# Altium PCB 1wire-Thermocouple.PcbDoc
Units mil, origin at the board's own origin, x right, y up, seen from the top; angles counter-clockwise.
Board outline 838.58 x 1975.39 mil, 2 copper layers (Top Layer, Bottom Layer); 6 components, 7 nets, 32 pads, 2 vias.
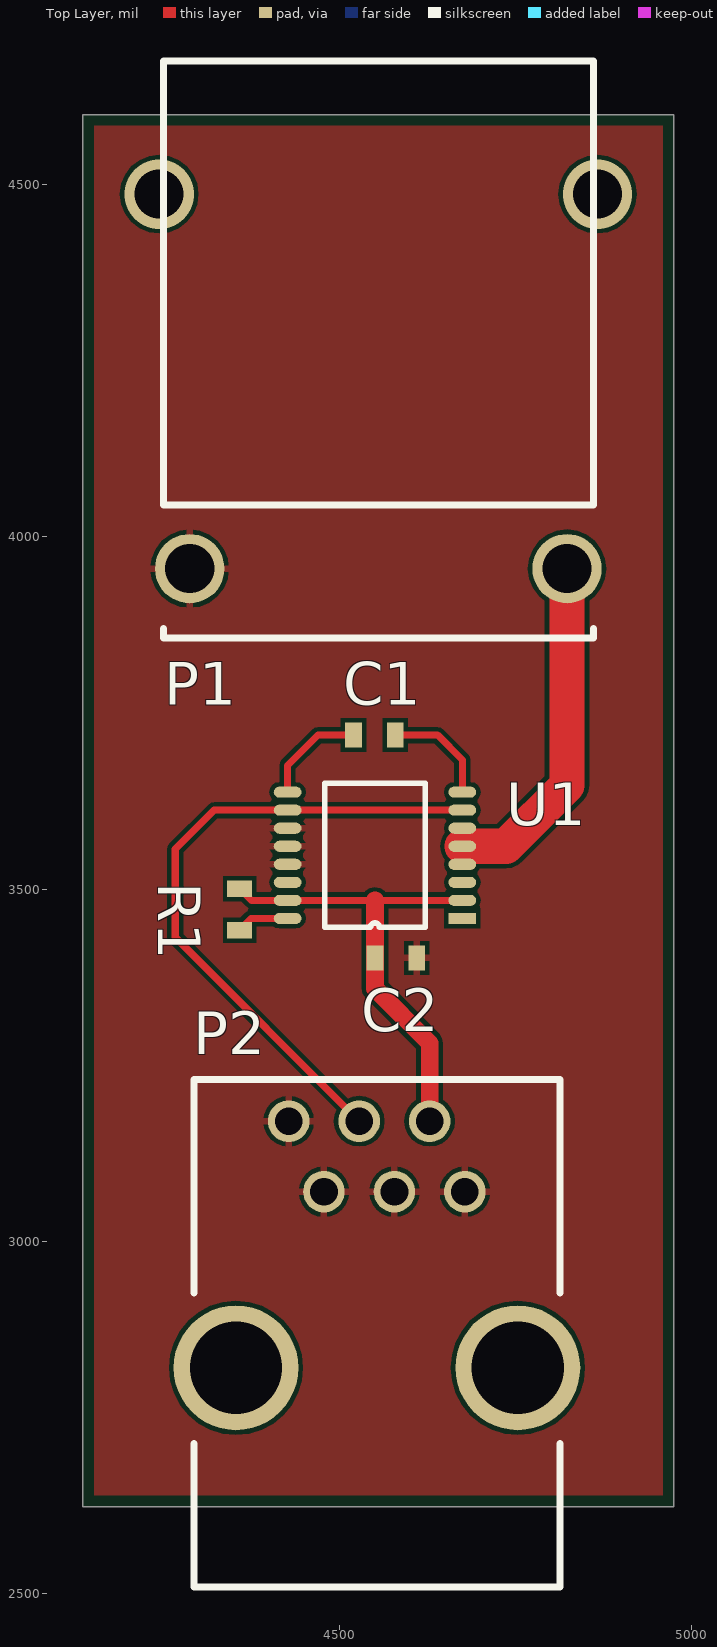
[diagram p0: Top Layer view]
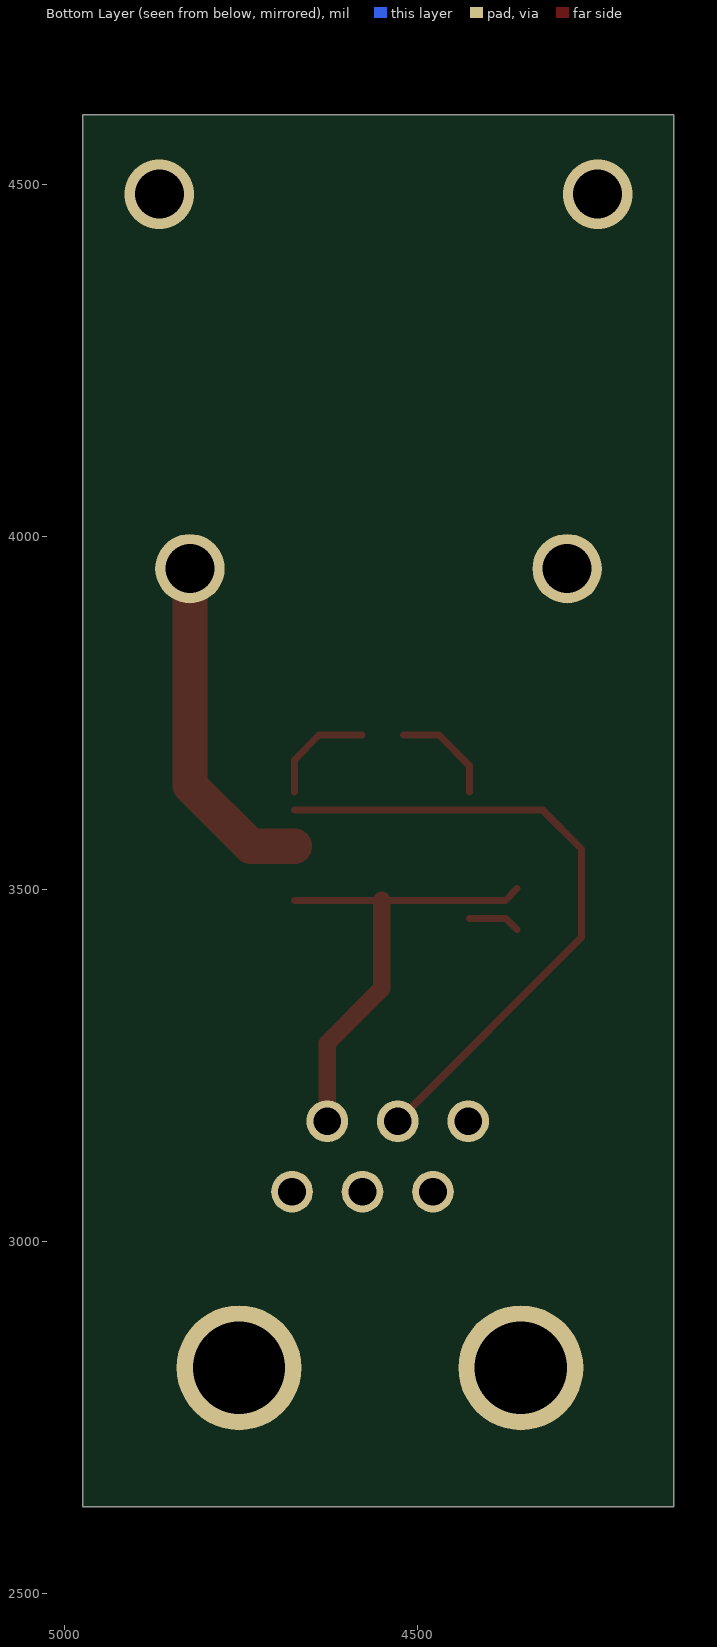
[diagram p1: Bottom Layer view, seen from below]

## Layer stack, top to bottom
Top Layer: signal copper 1.4
Dielectric: dielectric 12.6, FR-4, Dk 4.8
Bottom Layer: signal copper 1.4

## Board outline
4135.83,2624.02 4974.41,2624.02 4974.41,4599.41 4135.83,4599.41

## Design rules (kind name [scope] priority, off if disabled: settings)
Clearance [All] p1: gap=6
HoleSize [All] p1: absolutevalues=TRUE maxlimit=250 minlimit=1 maxpercent=80.000 minpercent=20.000
MinimumSolderMaskSliver [All] p1: minsoldermaskwidth=1
PolygonConnect [All] p1: connectstyle=Relief reliefconductorwidth=10 reliefentries=4 polygonreliefangle="90 Angle"
RoutingVias [All] p1: holewidth=28 width=50 viastyle="Through Hole" minholewidth=28 minwidth=50 maxholewidth=28 maxwidth=50
SilkscreenOverComponentPads [All] p1: minsilkscreentomaskgap=10
SolderMaskExpansion [All] p1: expansion=4
Width [All] p1: maxlimit=50 minlimit=10 preferedwidth=10
25 further rules are at their usual default settings.

## Components (designator, comment, footprint, x,y, rotation, side; value= is the part's Value field where it differs from the comment)
C1 "Cap" 0603 4549.22,3718.7 r0 top
C2 "Cap" 0603 4579.72,3402.56 r0 top
P1 "Thermocouple" PCC-SMP 4555,3955 r90 top
P2 "ONEWIRE" "CONN MOD JACK R/A 6P6C" 4752.95,2820.87 r270 top
R1 "Res2" 0603 4358.27,3471.46 r270 top
U1 "DS2762" TSSOP-16 4674.22,3458.7 r180 top

## Footprints (in the part's own frame and the unit in brackets; to place one, negate y for a bottom-side part, rotate by r counter-clockwise, add the part's x,y. Pads: shape width x height; smd on the part's side, far side on the other; paste and mask are expansions set on the pad)
0603 [mm]
  rect 0.6x0.9 smd: 1(-0.75,0) 2(0.75,0)
"CONN MOD JACK R/A 6P6C" [mm] "RJ11 Jack"
  round 1.5 hole 1: 1(-8.89,-8.26) 2(-6.35,-6.99) 3(-8.89,-5.72) 4(-6.35,-4.45) 5(-8.89,-3.18) 6(-6.35,-1.91)
  round 4.5 hole 3.33: ""(0,0) ""(0,-10.16)
  silkscreen extent -10.4,-11.68 7.9,1.53
PCC-SMP [mm] "Thermocouple Connector"
  round 2.5 hole 1.77: 1(0,-6.8) 2(0,6.8)
  silkscreen extent -2.5,-7.75 18.3,7.75
TSSOP-16 [mm]
  rect 1x0.4 smd: 1(0,0)
  oval 1x0.4 smd: 2(0,-0.65) 3(0,-1.3) 4(0,-1.95) 5(0,-2.6) 6(0,-3.25) 7(0,-3.9) 8(0,-4.55) 9(6.3,-4.55) 10(6.3,-3.9) 11(6.3,-3.25) 12(6.3,-2.6) 13(6.3,-1.95) 14(6.3,-1.3) 15(6.3,-0.65) 16(6.3,0)
  silkscreen extent 1.33,-4.88 4.97,0.33

## Part data
C1 C2: "Capacitor"
P1: library part "Header 2", "Header, 2-Pin"
P2: library part "Header 6", "Header, 6-Pin"
R1: "Resistor"
U1: "High-Precision Li+ Battery Monitor With Alerts"

## Via types
v1: diameter 98.43, hole 69.69, Top Layer to Bottom Layer, 2 vias

## Nets (pads, with @x,y where several pads share a name; then routed paths per layer and width w, separated by ;. In a path a pad name is that pad's centre, name@x,y a point inside that pad or via, vN(x,y) a via of type N, cw(c..) or ccw(c..) an arc to the next point about the centre after c; other vN are vias at no path point)
GND: C2.2 P1.2 P2.1 P2.2 P2.4 P2.6 U1.11 U1.12 U1.13
NetC1_1: C1.1 U1.9 | length 149.2
  Top Layer w10: U1.9 4426.18,3675.67 4469.22,3718.7 C1.1
NetC1_2: C1.2 U1.8 | length 155.8
  Top Layer w10: C1.2 4639.22,3718.7 4674.22,3683.7 U1.8
NetP1_1: P1.1 U1.4 U1.5 U1.6 | length 491.8
  Top Layer w50: U1.5 4736.26,3561.06 4822.72,3647.52 P1.1
NetP2_3: P2.3 U1.7 U1.10 | length 924.7
  Top Layer w10: P2.3 4266.73,3431.89 4266.73,3557.09 4321.89,3612.24 U1.10 U1.7
NetR1_2: R1.2 U1.16 | length 74.5
  Top Layer w10: R1.2@4358.27,3442.91 4374.05,3458.7 U1.16
VDD: C2.1 P2.5 R1.1 U1.2 U1.15 | length 668.4
  Top Layer w10: R1.1 4374.96,3484.29 U1.15 4550.2,3484.29 U1.2
  Top Layer w25: 4550.2,3484.29 4550.2,3359.25 4627.76,3281.69 P2.5
pads on no net: P2. U1.1 U1.3 U1.14
copper on no net:
  other v1: 4243.98,4486.5 4866.02,4486.5

## Polygon pours and split planes (outlines as drawn)
GND on Top Layer "Bottom Layer-No Net 1" (solid): 4151.57,4583.66 4151.57,2639.76 4958.66,2639.76 4958.66,4583.66 4151.57,4583.66

## Silkscreen, mask and mechanical layers (free items; w line width, h text height)
Mechanical 1:
  the board outline again, w10